# Altium PCB 输入模块.PcbDoc
Units mm, origin at the board's own origin, x right, y up, seen from the top; angles counter-clockwise.
Board outline 152.4 x 101.6 mm, 2 copper layers (Top Layer, Bottom Layer); 11 components, 8 nets, 25 pads, 9 vias.
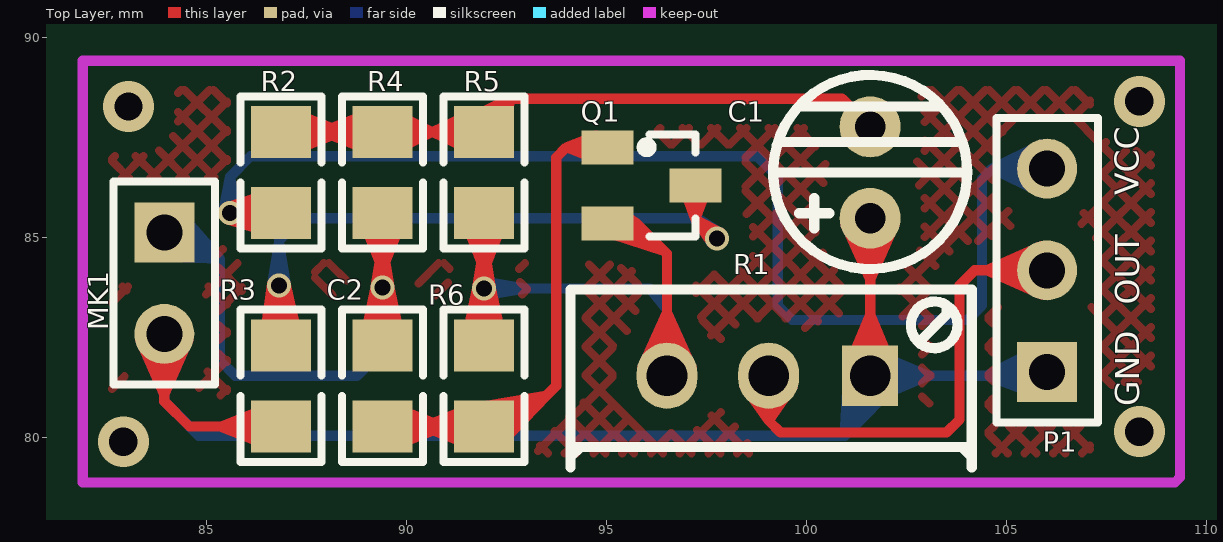
[diagram p0: Top Layer view]
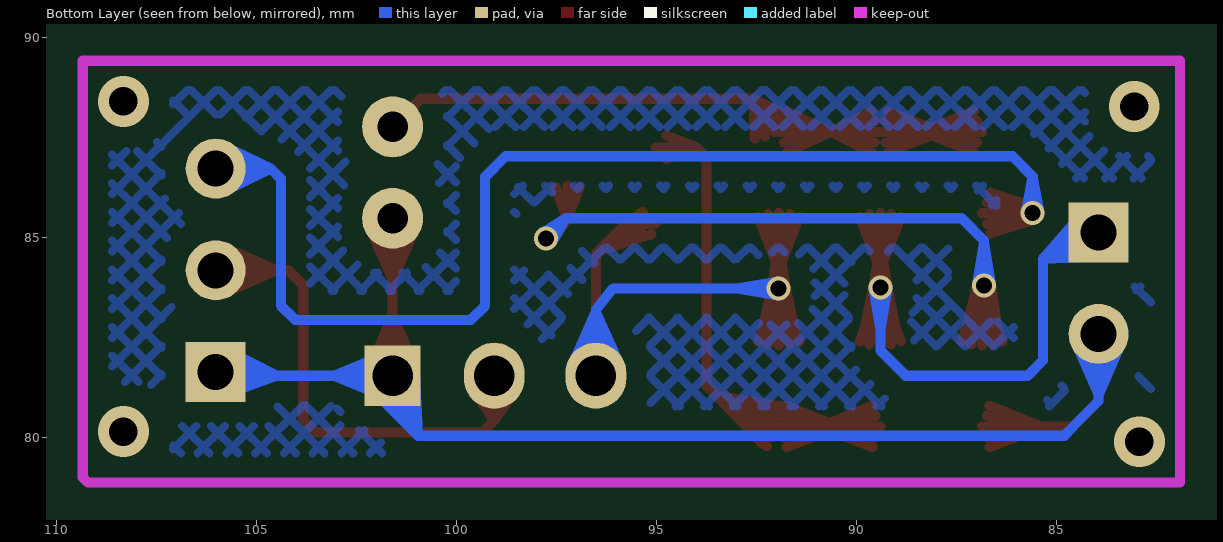
[diagram p1: Bottom Layer view, seen from below]

## Layer stack, top to bottom
Top Layer: signal copper 0.0356
Dielectric: dielectric 0.32, FR-4, Dk 4.8
Bottom Layer: signal copper 0.0356

## Board outline
25.4,25.4 177.8,25.4 177.8,127 25.4,127

## Design rules (kind name [scope] priority, off if disabled: settings)
Clearance [All] p1: gap=0.5
ComponentClearance [All] p1: gap=0.254 collisioncheckmode=0
PolygonConnect [All] p1: connectstyle=Relief reliefconductorwidth=0.254 reliefentries=4 polygonreliefangle="90 Angle"
RoutingVias [All] p1: holewidth=0.711 width=1.27 viastyle="Through Hole" minholewidth=0.711 minwidth=1.27 maxholewidth=0.711 maxwidth=1.27
SolderMaskExpansion [All] p1: expansion=0.102
TestPointUsage [All] p1: valid=0 allowmultiple=FALSE
Testpoint [All] p1: side=15 testpointundercomponent=TRUE minsize=1.016 maxsize=2.54 preferedsize=1.524 minholesize=0 maxholesize=1.016 preferedholesize=0.813 testpointgrid=0.025 style=1023 order=1234567890
Width [All] p1: maxlimit=0.254 minlimit=0.254 preferedwidth=0.254
17 further rules are at their usual default settings.

## Components (designator, comment, footprint, x,y, rotation, side; value= is the part's Value field where it differs from the comment)
C1 "DJDR" C-DJ-4 104.14,87.884 r90 top
C2 "CPDR" TP-0805-R 90.678,83.82 r90 top
MK1 "MKF" HDR-2 82.804,81.28 r270 top
P1 "Header 3" HDR-3 107.188,87.884 r90 top
Q1 "TPSJG_NPN" SO-G3 96.012,85.344 r270 top
R1 "Res _JT" SIP3-D 101.6,81.28 r180 top
R2 "Res" TP-0805-R 85.598,84.074 r270 top
R3 "Res" TP-0805-R 88.138,83.82 r90 top
R4 "Res" TP-0805-R 90.678,89.154 r90 top
R5 "Res" TP-0805-R 93.218,89.154 r90 top
R6 "Res" TP-0805-R 93.218,83.82 r90 top

## Footprints (in the part's own frame and the unit in brackets; to place one, negate y for a bottom-side part, rotate by r counter-clockwise, add the part's x,y. Pads: shape width x height; smd on the part's side, far side on the other; paste and mask are expansions set on the pad)
C-DJ-4 [mil] "电容4mm"
  round 60 hole 30: 1(-95,100) 2(-5,100)
  silkscreen extent -145,4 46,195
HDR-2 [mm] "2排针"
  rect 1.5x1.5 hole 0.9: 1(-3.84,1.148)
  round 1.5 hole 0.9: 2(-1.3,1.148)
  silkscreen extent -5.11,-0.12 -0.03,2.42
HDR-3 [mm] "3排针"
  rect 1.5x1.5 hole 0.9: 1(-6.253,1.165)
  round 1.5 hole 0.9: 2(-3.713,1.165) 3(-1.173,1.165)
  silkscreen extent -7.52,-0.11 0.1,2.43
SIP3-D [mil] "精调电位器"
  rect 55x60 hole 40: 1(0,-10)
  oval 60x65 hole 40: 2(200,-10) 3(100,-10)
  silkscreen extent -100,-95 295,80
SO-G3 [mm] "贴片三极管"
  rect 0.85x1.3 smd: 1(-1.9,-0.983) 2(0,-0.983) 3(-0.95,1.217)
  silkscreen extent -2.23,-0.12 0.32,1.22
TP-0805-R [mm] "贴片0805"
  rect 1.3x1.5 smd: 1(-3.556,1.27) 2(-1.524,1.27)
  silkscreen extent -4.44,0.25 -0.64,2.29

## Part data
C1: "电解电容"
C2: "瓷片电容"
MK1: "麦克风"
P1: "Header, 3-Pin"
Q1: "贴片三极管——NPN"
R1: "j精调电阻"
R2 R3 R4 R5 R6: "电阻"

## Via types
v1: diameter 0.6, hole 0.4, Top Layer to Bottom Layer, 5 vias
v2: diameter 1.27, hole 0.711, Top Layer to Bottom Layer, 4 vias

## Nets (pads, with @x,y where several pads share a name; then routed paths per layer and width w, separated by ;. In a path a pad name is that pad's centre, name@x,y a point inside that pad or via, vN(x,y) a via of type N, cw(c..) or ccw(c..) an arc to the next point about the centre after c; other vN are vias at no path point)
GND: C1.1 MK1.2 P1.1 R1.1 R3.1 | length 98.7
  Top Layer w0.254: MK1.2@83.342,82.452 83.952,81.068 ; MK1.2@83.586,82.535 83.952,81.068 ; MK1.2@84.318,82.535 83.952,81.068 ; MK1.2@84.562,82.452 83.952,81.068 ; R3.1@86.671,79.75 85.356,80.264 ; R3.1@86.671,80.778 85.356,80.264 ; R3.1@86.742,79.996 85.356,80.264 ; R3.1@86.742,80.532 85.356,80.264 ; R3.1@86.768,80.264 85.356,80.264 ; R3.1 84.582,80.264 83.952,80.894 MK1.2 83.952,81.068 ; C1.1@100.979,85.339 101.6,83.947 ; R1.1@101.04,81.709 101.6,83.058 ; C1.1@101.222,85.423 101.6,83.947 ; R1.1@101.284,81.632 101.6,83.058 ; R1.1 C1.1 ; R1.1@101.6,81.597 101.6,83.058 ; R1.1@101.916,81.632 101.6,83.058 ; C1.1@101.978,85.423 101.6,83.947 ; R1.1@102.16,81.709 101.6,83.058 ; C1.1@102.221,85.339 101.6,83.947
  Bottom Layer w0.254: MK1.2@83.342,82.452 83.952,81.068 ; MK1.2@83.586,82.535 83.952,81.068 ; MK1.2@84.318,82.535 83.952,81.068 ; MK1.2@84.562,82.452 83.952,81.068 ; R1.1@101.044,81.603 100.965,80.035 ; R1.1@101.298,81.569 100.965,80.035 ; R1.1@101.635,81.218 103.06,81.534 ; R1.1@101.635,81.85 103.06,81.534 ; R1.1@101.712,80.974 103.06,81.534 ; R1.1@101.712,82.094 103.06,81.534 ; R1.1@101.876,81.313 100.965,80.035 ; R1.1@102.072,81.148 100.965,80.035 ; P1.1@105.761,81.631 105.664,81.534 R1.1 101.6,80.67 ; P1.1@105.857,82.231 104.503,81.534 ; P1.1@105.935,81.014 104.503,81.534 ; P1.1@105.955,81.994 104.503,81.534 ; P1.1@106.002,81.263 104.503,81.534 ; P1.1 104.503,81.534 ; 83.952,81.068 MK1.2 83.952,80.904 84.592,80.264 84.592,80.254 84.811,80.035 100.965,80.035 ; 100.965,80.035 101.6,80.67 ; 100.965,80.035 R1.1@101.6,81.471 ; 101.6,80.67 102.134,81.266 101.6,80.67 ; 101.6,80.67 101.066,81.266 101.6,80.67 ; 101.6,80.67 101.911,81.408 101.6,80.67 ; 101.6,80.67 101.289,81.408 101.6,80.67 ; 101.6,80.67 R1.1@101.6,81.471 ; 101.6,80.67 R1.1@101.6,81.471
NetC1_2: C1.2 R2.1 R4.2 R5.2 | length 46.2
  Top Layer w0.254: R2.1 R4.2 90.653,87.63 ; R2.1@86.968,87.63 88.38,87.63 ; R2.1@86.994,87.362 88.38,87.63 ; R2.1@86.994,87.898 88.38,87.63 ; R2.1@87.065,87.116 88.38,87.63 ; R2.1@87.065,88.144 88.38,87.63 ; R4.2@89.211,87.116 87.896,87.63 ; R4.2@89.211,88.144 87.896,87.63 ; R4.2@89.282,87.362 87.896,87.63 ; R4.2@89.282,87.898 87.896,87.63 ; R4.2@89.308,87.63 87.896,87.63 ; R4.2@89.508,87.63 90.653,87.63 ; R4.2@89.54,87.363 90.653,87.63 ; R4.2@89.54,87.897 90.653,87.63 ; R4.2@89.627,87.121 90.653,87.63 ; R4.2@89.627,88.139 90.653,87.63 ; R5.2@91.7,88.02 92.583,88.458 ; R5.2@91.734,87.12 90.653,87.63 ; R5.2@91.734,88.14 90.653,87.63 ; R5.2@91.818,87.363 90.653,87.63 ; R5.2@91.818,87.897 90.653,87.63 ; R5.2@91.844,87.805 92.583,88.458 ; R5.2@91.848,87.63 90.653,87.63 ; R5.2@92.048,87.63 92.583,88.458 ; R5.2@92.292,87.516 92.583,88.458 ; R5.2@92.547,87.473 92.583,88.458 ; C1.2 100.899,88.458 92.583,88.458 ; 90.653,87.63 R5.2 91.948,87.823 92.583,88.458
NetC2_1: C2.1 Q1.1 R6.1 | length 85.3
  Top Layer w0.254: R6.1@91.879,80.759 93.51,81.039 ; R6.1@91.942,80.511 93.51,81.039 ; R6.1@92.193,80.037 93.51,81.039 ; R6.1@92.363,79.846 93.51,81.039 ; Q1.1@94.749,86.951 94.005,87.244 ; Q1.1@94.749,87.537 94.005,87.244 ; Q1.1@94.804,87.244 94.005,87.244 ; Q1.1 94.005,87.244 ; C2.1 R6.1 ; C2.1 R6.1 ; C2.1 R6.1 ; C2.1@89.508,80.264 90.92,80.264 ; C2.1@89.508,80.264 90.92,80.264 ; C2.1@89.508,80.264 90.92,80.264 ; C2.1@89.534,79.996 90.92,80.264 ; C2.1@89.534,79.996 90.92,80.264 ; C2.1@89.534,79.996 90.92,80.264 ; C2.1@89.534,80.532 90.92,80.264 ; C2.1@89.534,80.532 90.92,80.264 ; C2.1@89.534,80.532 90.92,80.264 ; C2.1@89.605,79.75 90.92,80.264 ; C2.1@89.605,79.75 90.92,80.264 ; C2.1@89.605,79.75 90.92,80.264 ; C2.1@89.605,80.778 90.92,80.264 ; C2.1@89.605,80.778 90.92,80.264 ; C2.1@89.605,80.778 90.92,80.264 ; 90.436,80.264 R6.1@91.751,79.75 ; 90.436,80.264 R6.1@91.751,80.778 ; 90.436,80.264 R6.1@91.822,79.996 ; 90.436,80.264 R6.1@91.822,80.532 ; 90.436,80.264 R6.1@91.848,80.264 ; 90.436,80.264 R6.1@91.751,79.75 ; 90.436,80.264 R6.1@91.751,80.778 ; 90.436,80.264 R6.1@91.822,79.996 ; 90.436,80.264 R6.1@91.822,80.532 ; 90.436,80.264 R6.1@91.848,80.264 ; 90.436,80.264 R6.1@91.751,79.75 ; 90.436,80.264 R6.1@91.751,80.778 ; 90.436,80.264 R6.1@91.822,79.996 ; 90.436,80.264 R6.1@91.822,80.532 ; 90.436,80.264 R6.1@91.848,80.264 ; R6.1 92.735,80.264 ; R6.1 92.735,80.264 ; R6.1 92.735,80.264 ; R6.1@92.048,80.264 92.735,80.264 ; R6.1@92.048,80.264 92.735,80.264 ; R6.1@92.048,80.264 92.735,80.264 ; R6.1@92.048,80.264 93.51,81.039 ; R6.1@92.048,80.264 92.735,80.264 ; R6.1@92.101,80 92.735,80.264 ; R6.1@92.101,80 92.735,80.264 ; R6.1@92.101,80 92.735,80.264 ; R6.1@92.101,80 92.735,80.264 ; R6.1@92.101,80.528 92.735,80.264 ; R6.1@92.101,80.528 92.735,80.264 ; R6.1@92.101,80.528 92.735,80.264 ; R6.1@92.101,80.528 92.735,80.264 ; R6.1@92.247,79.78 92.735,80.264 ; R6.1@92.247,79.78 92.735,80.264 ; R6.1@92.247,79.78 92.735,80.264 ; R6.1@92.247,79.78 92.735,80.264 ; R6.1@92.247,80.748 92.735,80.264 ; R6.1@92.247,80.748 92.735,80.264 ; R6.1@92.247,80.748 92.735,80.264 ; R6.1@92.247,80.748 92.735,80.264 ; 92.735,80.264 93.751,81.28 93.751,86.99 94.005,87.244
NetC2_2: C2.2 MK1.1 R4.1 | length 51.9
  Top Layer w0.254: C2.2@88.894,82.393 v1@89.408,83.708 ; R4.1@88.894,85.501 89.408,84.186 ; C2.2@89.14,82.322 v1@89.408,83.708 ; R4.1@89.14,85.572 89.408,84.186 ; v1@89.236,83.73 89.408,82.682 v1@89.58,83.73 ; v1@89.236,83.758 89.408,84.806 v1@89.58,83.758 ; v1@89.236,83.762 C2.2@89.212,82.695 ; v1@89.241,83.698 C2.2@89.604,82.695 ; v1@89.242,83.792 C2.2@89.026,82.73 ; v1@89.252,83.67 C2.2@89.79,82.73 ; C2.2 R4.1 ; v1@89.564,83.67 C2.2@89.026,82.73 ; v1@89.575,83.698 C2.2@89.212,82.695 ; v1@89.574,83.792 C2.2@89.79,82.73 ; v1@89.58,83.762 C2.2@89.604,82.695 ; C2.2@89.676,82.322 v1@89.408,83.708 ; R4.1@89.676,85.572 89.408,84.186 ; C2.2@89.922,82.393 v1@89.408,83.708 ; R4.1@89.922,85.501 89.408,84.186 ; C2.2@89.026,82.73 v1(89.408,83.744) ; C2.2@89.212,82.695 v1(89.408,83.744) ; v1(89.408,83.744) C2.2@89.604,82.695 ; v1(89.408,83.744) C2.2@89.79,82.73
  Bottom Layer w0.254: MK1.1@83.802,84.515 85.344,84.455 ; MK1.1@83.834,84.77 85.344,84.455 ; MK1.1@84.15,85.432 85.344,84.455 ; MK1.1@84.329,85.616 85.344,84.455 ; v1@89.236,83.73 89.408,82.682 v1@89.58,83.73 ; v1(89.408,83.744) 89.408,82.169 88.773,81.534 85.725,81.534 85.344,81.915 85.344,84.455 ; 85.344,84.455 84.679,85.12 MK1.1 85.344,84.455
NetP1_2: P1.2 R1.3 | length 23.2
  Top Layer w0.254: R1.3@98.454,81.279 99.06,80.416 ; R1.3@98.685,81.402 99.06,80.416 ; R1.3@99.06,81.471 99.06,80.416 ; R1.3 99.06,80.416 ; R1.3@99.435,81.402 99.06,80.416 ; R1.3@99.666,81.279 99.06,80.416 ; P1.2@105.895,83.561 104.511,84.171 ; P1.2@105.895,84.781 104.511,84.171 ; P1.2@105.978,83.805 104.511,84.171 ; P1.2@105.978,84.537 104.511,84.171 ; P1.2 104.212,84.171 103.835,83.795 103.835,80.442 103.505,80.112 99.365,80.112 99.06,80.416 ; P1.2@106.147,83.998 P1.2@106.147,84.047
NetQ1_2: Q1.2 R1.2 R5.1 R6.2 | length 67.6
  Top Layer w0.254: R6.2@91.434,82.393 v1@91.948,83.708 ; R5.1@91.434,85.501 91.948,84.186 ; R6.2@91.68,82.322 v1@91.948,83.708 ; R5.1@91.68,85.572 91.948,84.186 ; v1@91.776,83.704 91.948,82.656 v1@92.12,83.704 ; v1@91.776,83.732 91.948,84.78 v1@92.12,83.732 ; v1@91.776,83.737 R6.2@91.748,82.67 ; v1@91.781,83.672 R6.2@92.148,82.67 ; v1@91.782,83.768 R6.2@91.557,82.708 ; v1@91.792,83.643 R6.2@92.339,82.708 ; R6.2 R5.1 ; v1@92.104,83.643 R6.2@91.557,82.708 ; v1@92.115,83.672 R6.2@91.748,82.67 ; v1@92.114,83.768 R6.2@92.339,82.708 ; v1@92.12,83.737 R6.2@92.148,82.67 ; R6.2@92.216,82.322 v1@91.948,83.708 ; R5.1@92.216,85.572 91.948,84.186 ; R6.2@92.462,82.393 v1@91.948,83.708 ; R5.1@92.462,85.501 91.948,84.186 ; Q1.2 95.758,85.344 ; Q1.2@95.134,85.072 96.448,84.654 ; Q1.2@95.43,85.585 96.448,84.654 ; R1.2@95.899,81.73 96.52,83.121 ; R1.2@96.142,81.645 96.52,83.121 ; R1.2 96.52,84.582 95.758,85.344 ; R1.2@96.52,81.597 96.52,83.121 ; R1.2@96.898,81.645 96.52,83.121 ; R1.2@97.141,81.73 96.52,83.121 ; R6.2@91.557,82.708 v1(91.948,83.718) ; R6.2@91.748,82.67 v1(91.948,83.718) ; v1(91.948,83.718) R6.2@92.148,82.67 ; v1(91.948,83.718) R6.2@92.339,82.708 ; Q1.2@95.254,85.344 96.448,84.654 ; Q1.2@95.254,85.344 95.758,85.344 ; Q1.2@95.254,85.344 95.758,85.344 ; 95.758,85.344 95.342,85.629 95.758,85.344 ; 95.758,85.344 95.342,85.06 95.758,85.344
  Bottom Layer w0.254: v1(91.948,83.718) 96.088,83.718 96.52,83.185 R1.2 ; v1@91.962,83.546 93.01,83.718 v1@91.962,83.891 ; R1.2@95.899,81.73 96.52,83.121 ; R1.2@96.142,81.645 96.52,83.121 ; R1.2@96.52,81.597 96.52,83.121 ; R1.2@96.898,81.645 96.52,83.121 ; R1.2@97.141,81.73 96.52,83.121
NetQ1_3: Q1.3 R3.2 | length 45.5
  Top Layer w0.254: R3.2@86.354,82.393 v1@86.868,83.708 ; R3.2@86.6,82.322 v1@86.868,83.708 ; v1@86.644,83.803 R3.2@86.679,82.73 ; v1@86.646,83.772 R3.2@86.868,82.73 ; v1@86.648,83.832 R3.2@86.496,82.755 ; v1@86.652,83.743 R3.2@87.053,82.75 ; v1@86.663,83.717 R3.2@87.227,82.789 ; R3.2 v1@86.868,83.795 ; v1@86.978,83.73 R3.2@86.496,82.755 ; v1@86.982,83.847 R3.2@87.227,82.789 ; v1@86.986,83.759 R3.2@86.679,82.73 ; v1@86.988,83.819 R3.2@87.053,82.75 ; v1@86.99,83.789 R3.2@86.868,82.73 ; R3.2@87.136,82.322 v1@86.868,83.708 ; R3.2@87.382,82.393 v1@86.868,83.708 ; Q1.3@96.936,86.241 97.231,85.446 ; Q1.3 97.231,85.446 ; Q1.3@97.523,86.243 97.231,85.446 ; v1@97.634,84.85 97.231,85.446 ; v1@97.864,85.104 97.231,85.446 ; R3.2@86.496,82.755 v1(86.817,83.795) ; R3.2@86.679,82.73 v1(86.817,83.795) ; v1(86.817,83.795) R3.2@87.053,82.75 ; v1(86.817,83.795) R3.2@87.227,82.789 ; v1(86.817,83.795) R3.2@86.868,82.73 ; 97.231,85.446 v1(97.765,84.963) 97.231,85.446
  Bottom Layer w0.254: v1@86.645,83.809 86.817,84.857 v1@86.99,83.809 ; v1(86.817,83.795) 86.817,84.912 87.376,85.471 97.282,85.471 ; v1@97.625,84.86 97.282,85.471 ; v1@97.874,85.097 97.282,85.471 ; 97.282,85.471 97.79,84.963 v1(97.765,84.963) 97.282,85.471
VCC: P1.3 R2.2 | length 62.4
  Top Layer w0.254: v1@85.535,85.437 R2.2@86.584,85.121 ; v1@85.535,85.759 R2.2@86.584,86.075 ; v1@85.572,85.427 R2.2@86.64,85.354 ; v1@85.572,85.769 R2.2@86.64,85.842 ; v1@85.651,85.433 R2.2@86.64,85.842 ; v1@85.651,85.763 R2.2@86.64,85.354 ; v1@85.685,85.449 R2.2@86.584,86.075 ; v1@85.685,85.747 R2.2@86.584,85.121 ; R2.2@86.651,85.088 v1(85.598,85.598) ; R2.2@86.651,86.108 v1(85.598,85.598) ; R2.2@86.737,85.331 v1(85.598,85.598) ; R2.2@86.737,85.865 v1(85.598,85.598) ; R2.2@86.768,85.598 v1(85.598,85.598) ; R2.2 v1(85.598,85.598) ; v1(85.598,85.598) R2.2@86.584,85.121 ; v1(85.598,85.598) R2.2@86.64,85.354 ; v1(85.598,85.598) R2.2@86.66,85.598 ; v1(85.598,85.598) R2.2@86.66,85.598 ; v1(85.598,85.598) R2.2@86.64,85.842 ; v1(85.598,85.598) R2.2@86.584,86.075 ; R2.2@86.66,85.598 85.612,85.77 R2.2@86.66,85.598 ; R2.2@86.66,85.598 85.612,85.426 R2.2@86.66,85.598
  Bottom Layer w0.254: v1@85.426,85.614 85.598,86.512 ; v1(85.598,85.598) 85.598,86.512 ; v1@85.77,85.614 85.598,86.512 ; P1.3@105.882,86.104 104.643,86.711 ; P1.3@105.882,87.318 104.643,86.711 ; P1.3@105.974,86.345 104.643,86.711 ; P1.3@105.974,87.077 104.643,86.711 ; P1.3 104.643,86.711 ; 85.598,86.512 86.106,87.02 98.781,87.02 99.289,86.512 99.289,83.287 99.644,82.931 104.038,82.931 104.394,83.287 104.394,86.462 104.643,86.711
copper on no net:
  other v2: 82.931,79.883 108.331,80.137 83.058,88.265 108.331,88.392

## Polygon pours and split planes (outlines as drawn)
no net on Top Layer (hatched 45Degree grid 0.508 track 0.203): 81.915,89.408 109.347,89.408 109.347,78.74 81.788,78.74 81.788,89.408
no net on Bottom Layer (hatched 45Degree grid 0.508 track 0.203): 81.915,89.408 109.347,89.408 109.347,78.867 81.915,78.867

## Keep-outs
Keep-Out Layer:
  lines w0.254: 81.915,78.867 81.915,89.408 109.347,89.408 109.347,78.994 109.22,78.867 81.915,78.867

## Silkscreen, mask and mechanical layers (free items; w line width, h text height)
Top Overlay:
  text "VCC" at 108.317,86.046 h0.6 r90
  text "OUT" at 108.331,83.312 h0.6 r90
  text "GND" at 108.331,80.772 h0.6 r90